# Altium PCB Board.PcbDoc
Units mm, origin at the board's own origin, x right, y up, seen from the top; angles counter-clockwise.
Board outline 55 x 30 mm, 2 copper layers (Top Layer, Bottom Layer), stack 1.57 mm thick; 42 components, 38 nets, 166 pads, 402 vias.
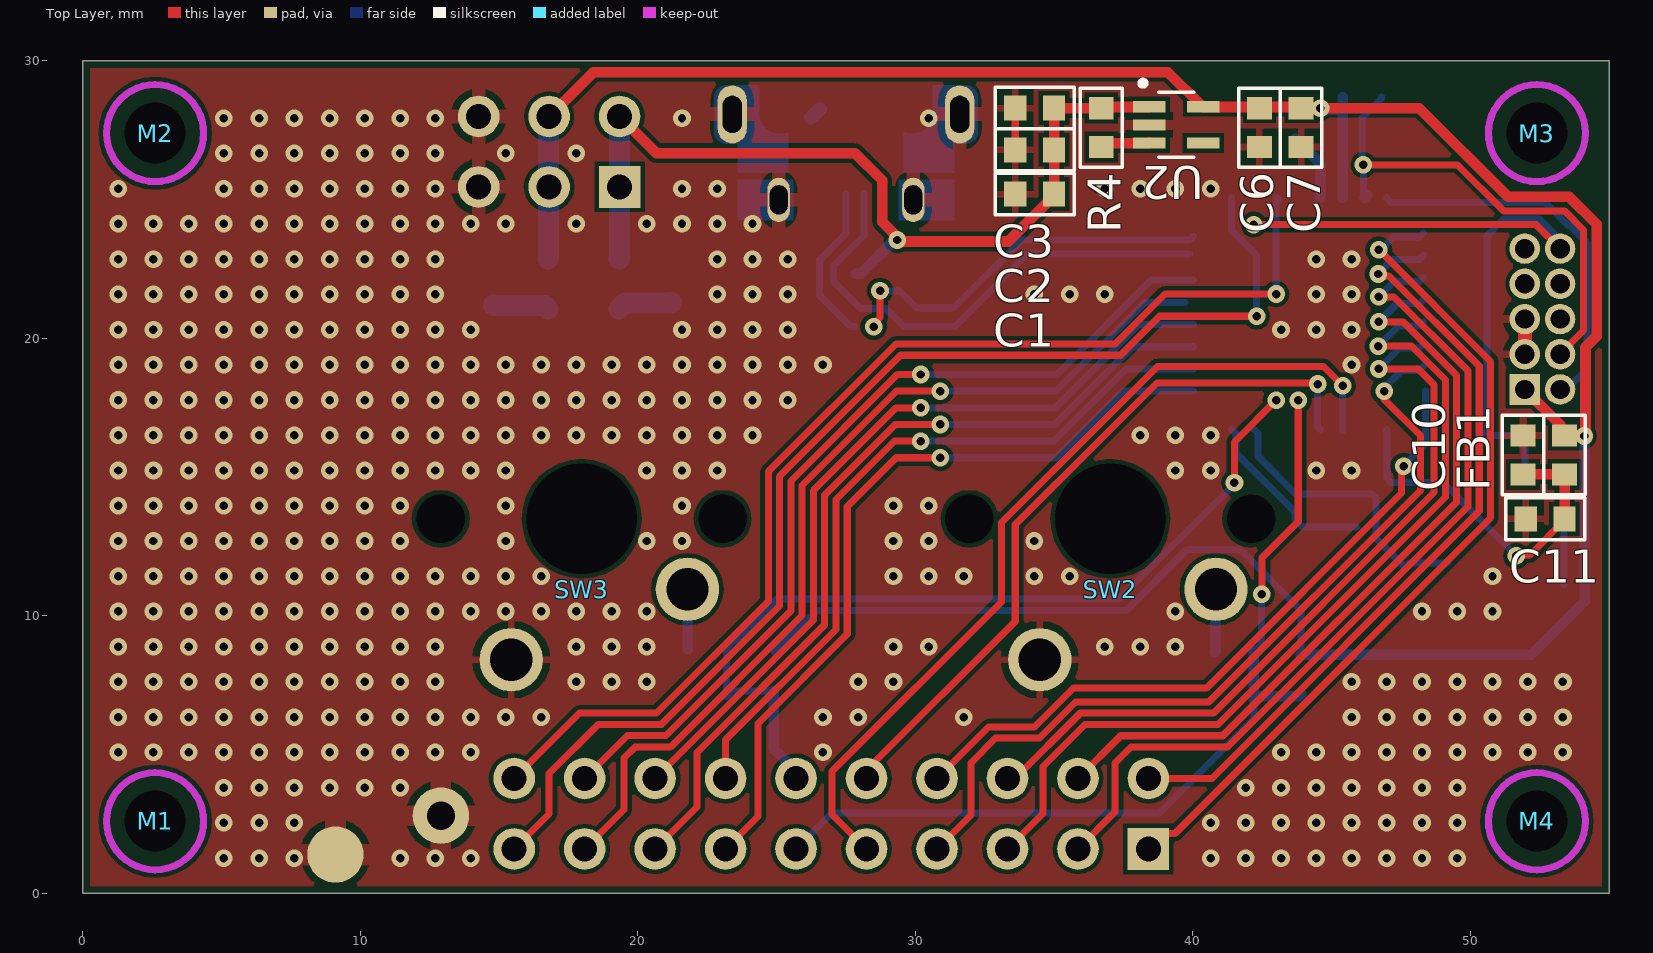
[diagram p0: Top Layer view]
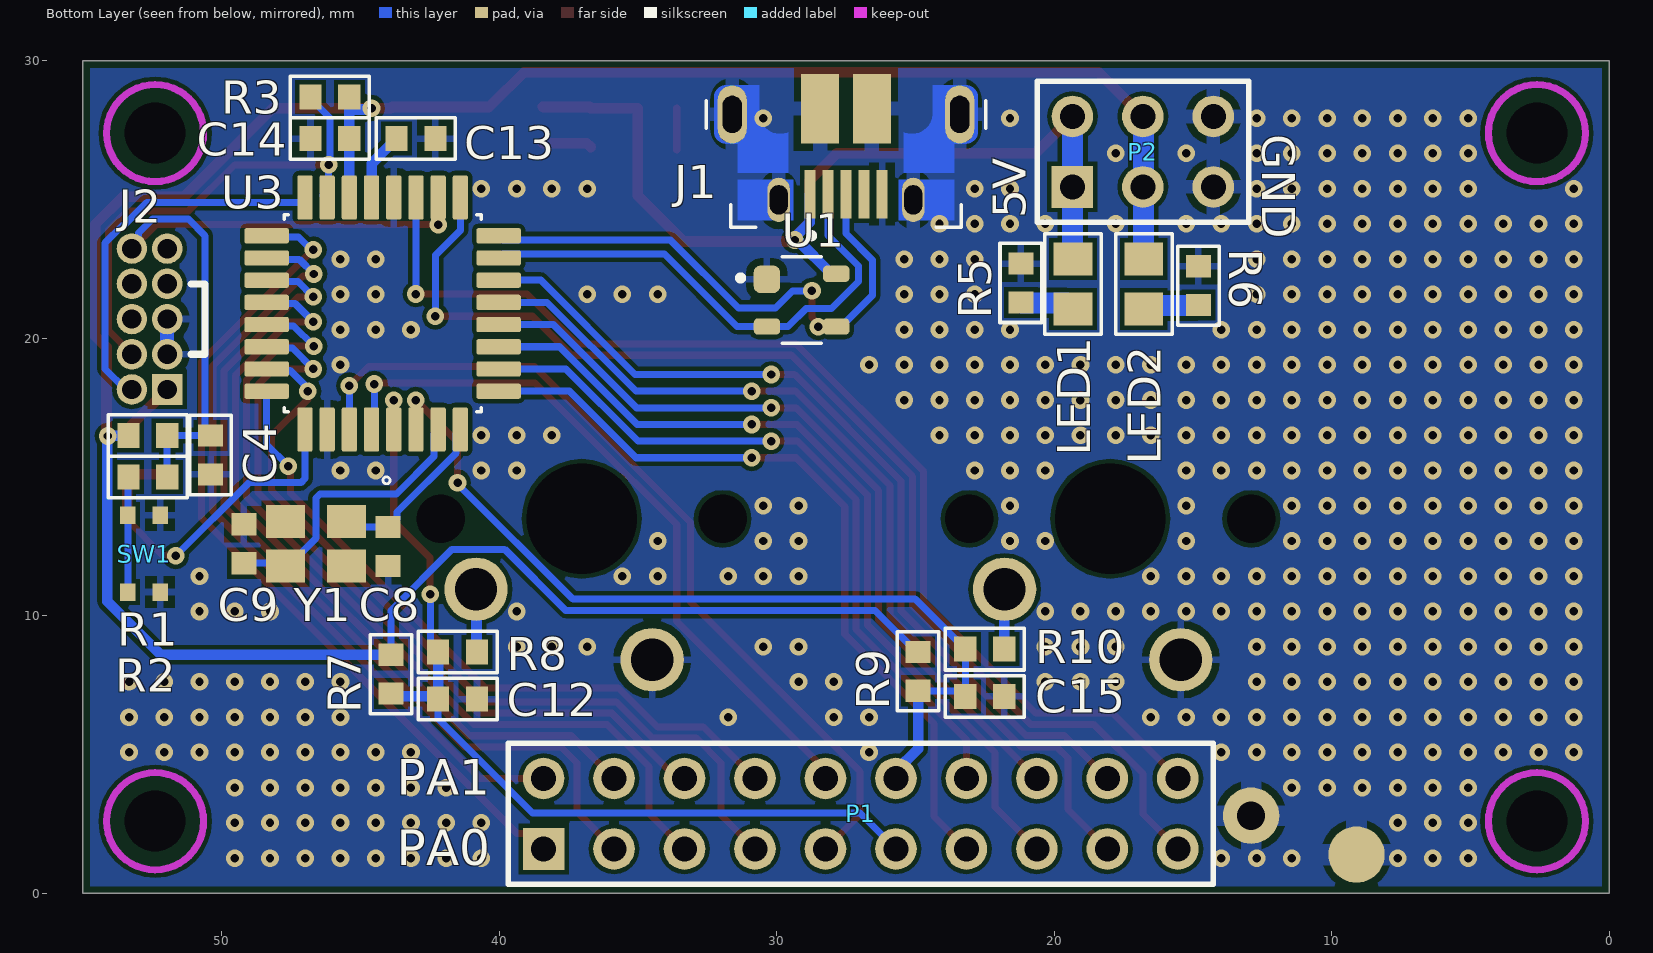
[diagram p1: Bottom Layer view, seen from below]
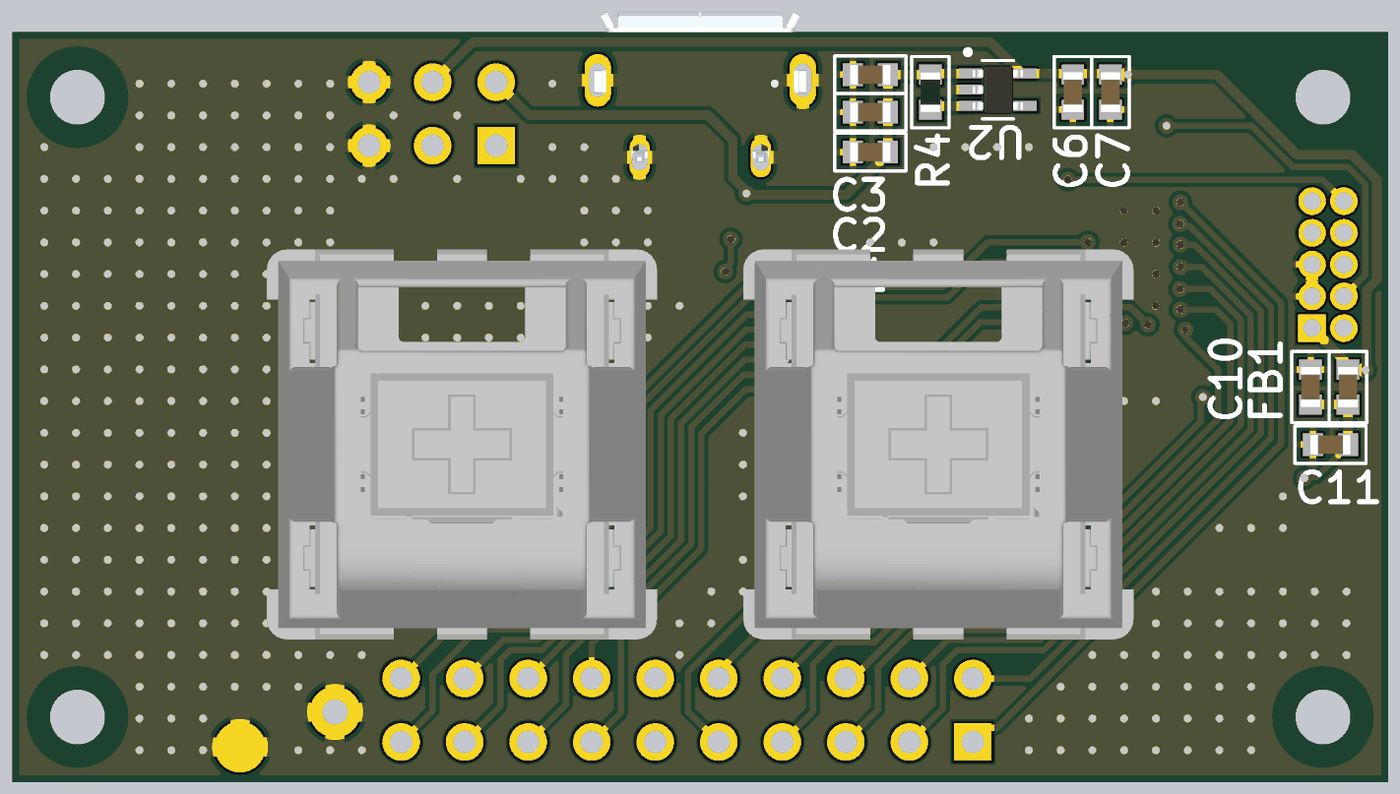
[diagram p2: 3D render of the assembled board from above, using the file's embedded part models]
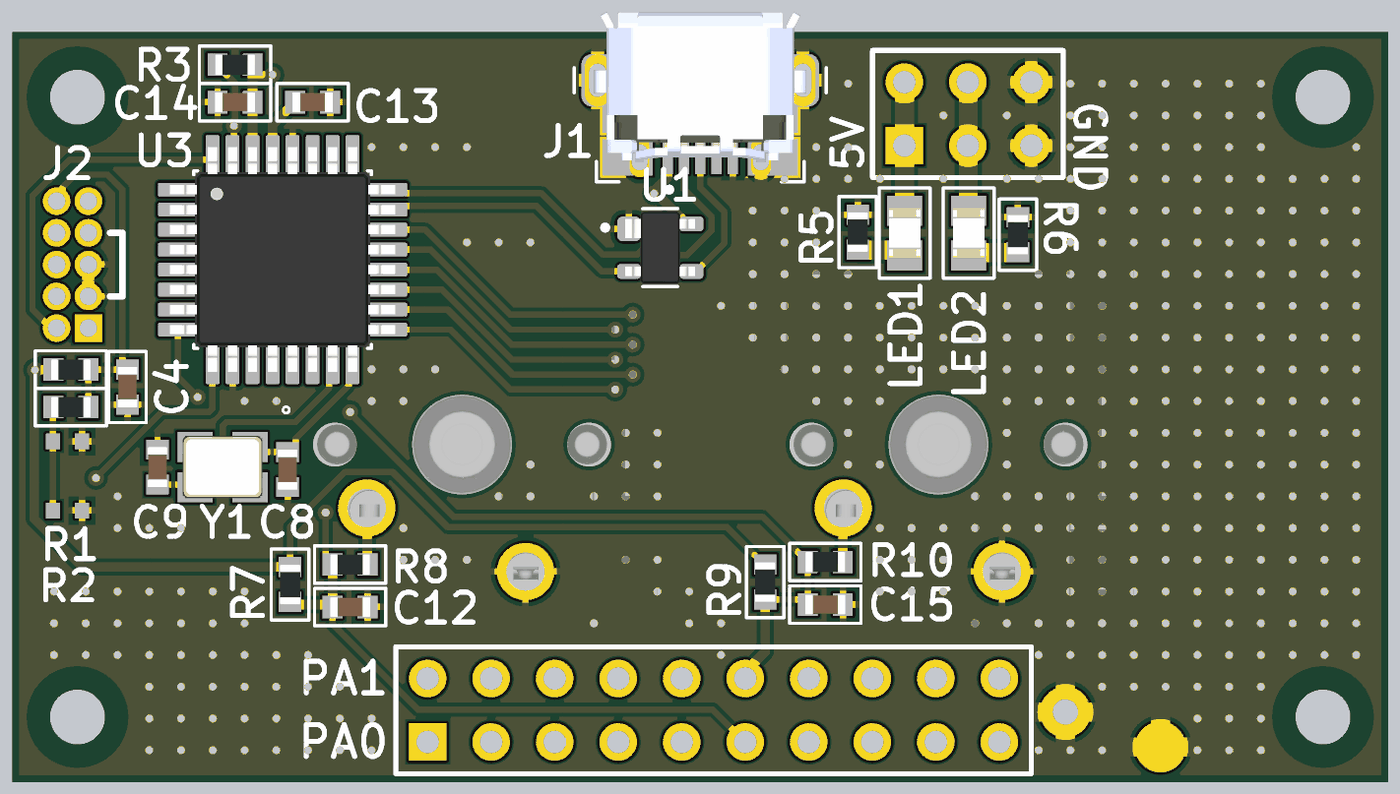
[diagram p3: 3D render of the assembled board from below, using the file's embedded part models]

## Layer stack, top to bottom
Top Solder: solder mask 0.0102, Solder Resist, Dk 3.5
Top Layer: signal copper 0.0356
Dielectric 1: core 1.4986, Core-043, Dk 4.3
Bottom Layer: signal copper 0.0356
Bottom Solder: solder mask 0.0102, Solder Resist, Dk 3.5

## Board outline
0,0 55,0 55,30 0,30

## Design rules (kind name [scope] priority, off if disabled: settings)
BoardOutlineClearance [All] p1: gap=0.254 ignorepadtopadclearanceinfootprint=FALSE except(0: Arc-SplitContinuation Track-SplitContinuation SMDPad-SplitContinuation THPad-SplitContinuation Via-SplitContinuation Fill-SplitContinuation Poly-SplitContinuation Region-SplitContinuation Text-SplitContinuation)
Clearance Clearance_Via_In_Pad [IsVia vs IsPad] p1: gap=0 ignorepadtopadclearanceinfootprint=FALSE
Clearance [All] p2: gap=0.152 ignorepadtopadclearanceinfootprint=FALSE except(0: Arc-Hole Track-Hole SMDPad-Hole THPad-Hole Via-Hole Fill-Hole Poly-Hole Region-Hole Text-Hole)
DiffPairsRouting [All] p1: maxlimit=0.254 minlimit=0.254 mostfreqgap=0.254 toplayer_minwidth=0.254 toplayer_maxwidth=0.381 toplayer_prefwidth=0.381 bottomlayer_minwidth=0.254 bottomlayer_maxwidth=0.381 bottomlayer_prefwidth=0.381 maxuncoupledlength=12.7
PolygonConnect [All] p1: thpad.connectstyle=Relief thpad.reliefconductorwidth=0.254 thpad.reliefentries=4 thpad.polygonreliefangle="90 Angle" thpad.airgapwidth=0.254 smdpad.connectstyle=Relief smdpad.reliefconductorwidth=0.254 smdpad.reliefentries=4 smdpad.polygonreliefangle="90 Angle" smdpad.airgapwidth=0.254 via.connectstyle=Direct via.reliefconductorwidth=0.254 via.reliefentries=4 via.polygonreliefangle="90 Angle" via.airgapwidth=0.254
RoutingVias [All] p1: holewidth=0.305 width=0.635 viastyle="Through Hole" minholewidth=0.254 minwidth=0.508 maxholewidth=0.711 maxwidth=1.27
SilkToSilkClearance [All] p1: silktosilkclearance=0.127
SolderMaskExpansion [All] p1: expansion=0.102 istentingtop=FALSE
Width [All] p1: maxlimit=2.54 minlimit=0.254 preferedwidth=0.254
28 further rules are at their usual default settings.

## Classes and differential pairs
differential pair USB_D: +USB_D_P -USB_D_N

## Components (designator, comment, footprint, x,y, rotation, side; value= is the part's Value field where it differs from the comment)
C1 "Cap" C0603 34.3,25.2 r180 top value=10uF
C2 "Cap" C0603 34.3,26.8 r180 top value=2.2uF
C3 "Cap" C0603 34.3,28.3 r180 top value=1uF
C4 "Cap" C0603 50.4,15.8 r270 bottom value=10nF
C6 "Cap" C0603 42.4,27.6 r270 top value=1uF
C7 "Cap" C0603 43.9,27.6 r270 top value=10uF
C8 "Cap" C0603 44,12.5 r270 bottom
C9 "Cap" C0603 49.2,12.6 r90 bottom
C10 "Cap" C0603 51.9,15.8 r90 top value=10uF
C11 "Cap" C0603 52.7,13.5 r180 top value=100nF
C12 "Cap" C0603 41.5,7 r180 bottom value=1nF
C13 "Cap" C0603 43,27.2 r180 bottom value=1uF
C14 "Cap" C0603 46.1,27.2 r0 bottom value=100nF
C15 "Cap" C0603 22.5,7.1 r180 bottom value=1nF
FB1 "Ferrite Bead" C0603 53.4,15.8 r270 top
J1 "10118194-0001LF" AMPHENOL_10103592-0001LF 27.5,28.075 r0 bottom locked
J2 "SWD_10_PIN" IPC_5X2_1.27MM 52.6,20.7 r90 bottom
LED1 "LED" LED0805 19.324,21.963 r270 bottom
LED2 "LED" LED0805 16.766,21.963 r270 bottom
M1 "SCREW_HOLE" SCREW_M2 2.6,2.6 r0 top locked
M2 "SCREW_HOLE" SCREW_M2 2.6,27.4 r0 top locked
M3 "SCREW_HOLE" SCREW_M2 52.4,27.4 r0 top
M4 "SCREW_HOLE" SCREW_M2 52.4,2.6 r0 top
P1 "Header 10X2" HDR2X10 38.4,1.6 r180 bottom
P2 "Header 3X2" HDR2X3 19.34,25.46 r180 bottom
R1 "Res" R0603 52.665,16.5 r180 bottom value=100K
R2 "Res" R0603 52.665,15 r0 bottom value=330
R3 "Res" R0603 46.1,28.7 r0 bottom value=1K
R4 "Res" R0603 36.7,27.6 r270 top value=10K
R5 "Res" R0603 21.2,22 r90 bottom value=330
R6 "Res" R0603 14.8,21.9 r90 bottom value=330
R7 "Res" R0603 43.9,7.9 r270 bottom value=10K
R8 "Res" R0603 41.5,8.7 r180 bottom value=330
R9 "Res" R0603 24.9,8 r270 bottom value=10K
R10 "Res" R0603 22.5,8.8 r180 bottom value=330
SW1 "Button" STU-057A23AX 52.8,12.246 r270 bottom
SW2 "CHERRY-MX" CHERRY_MX_1.0 37.025,13.5 r180 top
SW3 "CHERRY-MX" CHERRY_MX_1.0 17.975,13.5 r180 top
U1 "5.5V TVS Diode" SOT143 29.1,21.38 r180 bottom
U2 "MIC5365-3.3YC5-TR" SOT65P210X110-5N 39.4,27.7 r0 top
U3 "ATSAMD21EXXA/B/D" QFP80P900X900X120-32N 44.2,20.9 r180 bottom
Y1 "XTAL" SMD-4 46.6,12.6 r0 bottom

## Footprints (in the part's own frame and the unit in brackets; to place one, negate y for a bottom-side part, rotate by r counter-clockwise, add the part's x,y. Pads: shape width x height; smd on the part's side, far side on the other; paste and mask are expansions set on the pad)
AMPHENOL_10103592-0001LF [mm]
  rect 0.4x1.75 smd: 1(1.3,2.875) 2(0.65,2.875) 3(0,2.875) 4(-0.65,2.875) 5(-1.3,2.875)
  oval 0.8x1.6 hole 0.65 slot 1.05 at 90 deg: S1(-2.425,3.08) S2(2.425,3.08)
  oval 1.05x2.1 hole 0.7 slot 1.34 at 90 deg: S3(-4.1,0) S6(4.1,0)
  rect 1.375x2.5 smd: S4(-0.937,-0.2) S5(0.937,-0.2)
  Top Layer region: -2.66,3.804 -2.669,3.798 -2.677,3.791 -2.686,3.785 -2.694,3.778 -2.702,3.771 -2.71,3.764 -2.718,3.756 -2.725,3.748 -2.732,3.74 -2.739,3.732 -2.746,3.724 -2.752,3.715 -2.758,3.707 -2.764,3.698 -2.77,3.689 -2.776,3.68 -2.781,3.67 -2.786,3.661 -2.79,3.651 -2.795,3.641 -2.799,3.631 -2.802,3.621 -2.806,3.611 -2.809,3.601 -2.812,3.591 -2.814,3.58 -2.817,3.57 -2.819,3.559 -2.82,3.55 -2.81,2.59 -2.807,2.578 -2.804,2.568 -2.8,2.558 -2.796,2.548 -2.792,2.538 -2.788,2.528 -2.783,2.519 -2.778,2.509 -2.773,2.5 -2.767,2.49 -2.761,2.481 -2.755,2.472 -2.749,2.464 -2.743,2.455 -2.736,2.447 -2.729,2.439 -2.722,2.431 -2.714,2.423 -2.706,2.416 -2.698,2.408 -2.69,2.401 -2.682,2.395 -2.673,2.388 -2.665,2.382 -2.656,2.376 -2.647,2.37 -2.637,2.364 -2.628,2.359 -2.619,2.354 -2.61,2.35 -3.9,2.35 -3.9,3.81 -2.65,3.81
  Top Layer region: -1.9,2.35 -2.21,2.35 -2.202,2.355 -2.193,2.36 -2.184,2.367 -2.175,2.373 -2.167,2.38 -2.158,2.386 -2.15,2.394 -2.142,2.401 -2.134,2.408 -2.127,2.416 -2.119,2.424 -2.112,2.433 -2.105,2.441 -2.099,2.45 -2.092,2.458 -2.086,2.467 -2.08,2.477 -2.075,2.486 -2.069,2.495 -2.064,2.505 -2.06,2.515 -2.055,2.525 -2.051,2.535 -2.047,2.545 -2.044,2.555 -2.04,2.566 -2.037,2.576 -2.035,2.587 -2.032,2.597 -2.03,2.61 -2.04,3.58 -2.042,3.587 -2.044,3.596 -2.046,3.605 -2.049,3.613 -2.052,3.622 -2.056,3.63 -2.059,3.639 -2.063,3.647 -2.067,3.655 -2.071,3.663 -2.076,3.671 -2.08,3.679 -2.085,3.687 -2.09,3.694 -2.096,3.701 -2.101,3.709 -2.107,3.716 -2.113,3.722 -2.119,3.729 -2.126,3.736 -2.132,3.742 -2.139,3.748 -2.146,3.754 -2.153,3.76 -2.16,3.765 -2.168,3.77 -2.175,3.775 -2.183,3.78 -2.191,3.785 -2.2,3.79 -2.2,3.81 -1.9,3.81
  Top Layer region: 3.9,2.35 2.61,2.35 2.619,2.354 2.628,2.359 2.637,2.364 2.647,2.37 2.656,2.376 2.665,2.382 2.673,2.388 2.682,2.395 2.69,2.401 2.698,2.408 2.706,2.416 2.714,2.423 2.722,2.431 2.729,2.439 2.736,2.447 2.743,2.455 2.749,2.464 2.755,2.472 2.761,2.481 2.767,2.49 2.773,2.5 2.778,2.509 2.783,2.519 2.788,2.528 2.792,2.538 2.796,2.548 2.8,2.558 2.804,2.568 2.807,2.578 2.81,2.59 2.82,3.55 2.819,3.559 2.817,3.57 2.814,3.58 2.812,3.591 2.809,3.601 2.806,3.611 2.802,3.621 2.799,3.631 2.795,3.641 2.79,3.651 2.786,3.661 2.781,3.67 2.776,3.68 2.77,3.689 2.764,3.698 2.758,3.707 2.752,3.715 2.746,3.724 2.739,3.732 2.732,3.74 2.725,3.748 2.718,3.756 2.71,3.764 2.702,3.771 2.694,3.778 2.686,3.785 2.677,3.791 2.669,3.798 2.66,3.804 2.65,3.81 3.9,3.81
  Top Layer region: 2.2,3.79 2.191,3.785 2.183,3.78 2.175,3.775 2.168,3.77 2.16,3.765 2.153,3.76 2.146,3.754 2.139,3.748 2.132,3.742 2.126,3.736 2.119,3.729 2.113,3.722 2.107,3.716 2.101,3.709 2.096,3.701 2.09,3.694 2.085,3.687 2.08,3.679 2.076,3.671 2.071,3.663 2.067,3.655 2.063,3.647 2.059,3.639 2.056,3.63 2.052,3.622 2.049,3.613 2.046,3.605 2.044,3.596 2.042,3.587 2.04,3.58 2.03,2.61 2.032,2.597 2.035,2.587 2.037,2.576 2.04,2.566 2.044,2.555 2.047,2.545 2.051,2.535 2.055,2.525 2.06,2.515 2.064,2.505 2.069,2.495 2.075,2.486 2.08,2.477 2.086,2.467 2.092,2.458 2.099,2.45 2.105,2.441 2.112,2.433 2.119,2.424 2.127,2.416 2.134,2.408 2.142,2.401 2.15,2.394 2.158,2.386 2.167,2.38 2.175,2.373 2.184,2.367 2.193,2.36 2.202,2.355 2.21,2.35 1.9,2.35 1.9,3.81 2.2,3.81
  Top Layer region: 3.9,1.05 4.075,1.05 4.075,1.045 4.045,1.043 4.02,1.04 3.995,1.035 3.97,1.03 3.946,1.023 3.922,1.015 3.898,1.005 3.875,0.995 3.853,0.983 3.831,0.971 3.809,0.957 3.789,0.942 3.769,0.926 3.75,0.91 3.732,0.892 3.714,0.874 3.698,0.854 3.682,0.834 3.668,0.813 3.655,0.792 3.642,0.769 3.631,0.747 3.621,0.723 3.612,0.7 3.605,0.675 3.598,0.651 3.593,0.626 3.589,0.601 3.586,0.576 3.585,0.555 3.58,-0.53 3.581,-0.551 3.583,-0.577 3.586,-0.603 3.59,-0.628 3.596,-0.653 3.603,-0.678 3.611,-0.702 3.62,-0.726 3.631,-0.75 3.642,-0.773 3.655,-0.795 3.669,-0.817 3.684,-0.838 3.7,-0.858 3.717,-0.878 3.735,-0.896 3.754,-0.914 3.773,-0.931 3.794,-0.946 3.815,-0.961 3.837,-0.975 3.859,-0.987 3.882,-0.998 3.906,-1.009 3.93,-1.018 3.954,-1.026 3.979,-1.032 4.005,-1.038 4.03,-1.042 4.06,-1.045 4.06,-1.05 3.125,-1.05 3.125,0 3.12,0.053 3.112,0.1 3.101,0.147 3.087,0.193 3.07,0.238 3.051,0.281 3.028,0.324 3.003,0.365 2.975,0.404 2.945,0.442 2.913,0.477 2.878,0.51 2.841,0.541 2.803,0.57 2.763,0.596 2.721,0.619 2.677,0.64 2.633,0.658 2.587,0.673 2.541,0.685 2.493,0.694 2.446,0.7 2.398,0.703 2.35,0.703 2.302,0.699 2.254,0.693 2.207,0.684 2.161,0.671 2.115,0.656 2.075,0.64 2.075,2.1 3.9,2.1
  Top Layer region: 4.352,1.049 4.374,1.048 4.396,1.045 4.417,1.041 4.439,1.036 4.46,1.029 4.481,1.022 4.501,1.014 4.521,1.004 4.54,0.994 4.559,0.982 4.577,0.97 4.594,0.956 4.611,0.942 4.627,0.927 4.642,0.911 4.656,0.894 4.67,0.877 4.682,0.859 4.694,0.84 4.704,0.821 4.714,0.801 4.722,0.781 4.729,0.76 4.736,0.739 4.741,0.717 4.745,0.696 4.748,0.674 4.749,0.652 4.75,0.63 4.75,-0.63 4.749,-0.652 4.748,-0.674 4.745,-0.696 4.741,-0.717 4.736,-0.739 4.729,-0.76 4.722,-0.781 4.714,-0.801 4.704,-0.821 4.694,-0.84 4.682,-0.859 4.67,-0.877 4.656,-0.894 4.642,-0.911 4.627,-0.927 4.611,-0.942 4.594,-0.956 4.577,-0.97 4.559,-0.982 4.54,-0.994 4.521,-1.004 4.501,-1.014 4.481,-1.022 4.46,-1.029 4.439,-1.036 4.417,-1.041 4.396,-1.045 4.374,-1.048 4.352,-1.049 4.33,-1.05 4.105,-1.05 4.105,-1.045 4.13,-1.044 4.157,-1.042 4.183,-1.039 4.21,-1.034 4.236,-1.027 4.262,-1.02 4.288,-1.011 4.313,-1 4.337,-0.989 4.361,-0.976 4.384,-0.962 4.407,-0.946 4.428,-0.93 4.449,-0.912 4.468,-0.893 4.487,-0.874 4.505,-0.853 4.521,-0.832 4.537,-0.809 4.551,-0.786 4.564,-0.762 4.575,-0.738 4.586,-0.713 4.595,-0.687 4.602,-0.661 4.609,-0.635 4.614,-0.608 4.617,-0.582 4.619,-0.555 4.62,-0.525 4.62,0.555 4.619,0.576 4.616,0.601 4.612,0.626 4.607,0.651 4.6,0.675 4.593,0.7 4.584,0.723 4.574,0.747 4.563,0.769 4.55,0.792 4.537,0.813 4.523,0.834 4.507,0.854 4.491,0.874 4.473,0.892 4.455,0.91 4.436,0.926 4.416,0.942 4.396,0.957 4.374,0.971 4.352,0.983 4.33,0.995 4.307,1.005 4.283,1.015 4.259,1.023 4.235,1.03 4.21,1.035 4.185,1.04 4.16,1.043 4.13,1.045 4.13,1.05 4.33,1.05
  Top Layer region: -2.075,0.64 -2.115,0.656 -2.161,0.671 -2.207,0.684 -2.254,0.693 -2.302,0.699 -2.35,0.703 -2.398,0.703 -2.446,0.7 -2.493,0.694 -2.541,0.685 -2.587,0.673 -2.633,0.658 -2.677,0.64 -2.721,0.619 -2.763,0.596 -2.803,0.57 -2.841,0.541 -2.878,0.51 -2.913,0.477 -2.945,0.442 -2.975,0.404 -3.003,0.365 -3.028,0.324 -3.051,0.281 -3.07,0.238 -3.087,0.193 -3.101,0.147 -3.112,0.1 -3.12,0.053 -3.125,0 -3.125,-1.05 -4.06,-1.05 -4.06,-1.045 -4.03,-1.042 -4.005,-1.038 -3.979,-1.032 -3.954,-1.026 -3.93,-1.018 -3.906,-1.009 -3.882,-0.998 -3.859,-0.987 -3.837,-0.975 -3.815,-0.961 -3.794,-0.946 -3.773,-0.931 -3.754,-0.914 -3.735,-0.896 -3.717,-0.878 -3.7,-0.858 -3.684,-0.838 -3.669,-0.817 -3.655,-0.795 -3.642,-0.773 -3.631,-0.75 -3.62,-0.726 -3.611,-0.702 -3.603,-0.678 -3.596,-0.653 -3.59,-0.628 -3.586,-0.603 -3.583,-0.577 -3.581,-0.551 -3.58,-0.53 -3.585,0.555 -3.586,0.576 -3.589,0.601 -3.593,0.626 -3.598,0.651 -3.605,0.675 -3.612,0.7 -3.621,0.723 -3.631,0.747 -3.642,0.769 -3.655,0.792 -3.668,0.813 -3.682,0.834 -3.698,0.854 -3.714,0.874 -3.732,0.892 -3.75,0.91 -3.769,0.926 -3.789,0.942 -3.809,0.957 -3.831,0.971 -3.853,0.983 -3.875,0.995 -3.898,1.005 -3.922,1.015 -3.946,1.023 -3.97,1.03 -3.995,1.035 -4.02,1.04 -4.045,1.043 -4.075,1.045 -4.075,1.05 -3.9,1.05 -3.9,2.1 -2.075,2.1
  Top Layer region: -4.13,1.045 -4.16,1.043 -4.185,1.04 -4.21,1.035 -4.235,1.03 -4.259,1.023 -4.283,1.015 -4.307,1.005 -4.33,0.995 -4.352,0.983 -4.374,0.971 -4.396,0.957 -4.416,0.942 -4.436,0.926 -4.455,0.91 -4.473,0.892 -4.491,0.874 -4.507,0.854 -4.523,0.834 -4.537,0.813 -4.55,0.792 -4.563,0.769 -4.574,0.747 -4.584,0.723 -4.593,0.7 -4.6,0.675 -4.607,0.651 -4.612,0.626 -4.616,0.601 -4.619,0.576 -4.62,0.555 -4.62,-0.525 -4.619,-0.555 -4.617,-0.582 -4.614,-0.608 -4.609,-0.635 -4.602,-0.661 -4.595,-0.687 -4.586,-0.713 -4.575,-0.738 -4.564,-0.762 -4.551,-0.786 -4.537,-0.809 -4.521,-0.832 -4.505,-0.853 -4.487,-0.874 -4.468,-0.893 -4.449,-0.912 -4.428,-0.93 -4.407,-0.946 -4.384,-0.962 -4.361,-0.976 -4.337,-0.989 -4.313,-1 -4.288,-1.011 -4.262,-1.02 -4.236,-1.027 -4.21,-1.034 -4.183,-1.039 -4.157,-1.042 -4.13,-1.044 -4.105,-1.045 -4.105,-1.05 -4.33,-1.05 -4.352,-1.049 -4.374,-1.048 -4.396,-1.045 -4.417,-1.041 -4.439,-1.036 -4.46,-1.029 -4.481,-1.022 -4.501,-1.014 -4.521,-1.004 -4.54,-0.994 -4.559,-0.982 -4.577,-0.97 -4.594,-0.956 -4.611,-0.942 -4.627,-0.927 -4.642,-0.911 -4.656,-0.894 -4.67,-0.877 -4.682,-0.859 -4.694,-0.84 -4.704,-0.821 -4.714,-0.801 -4.722,-0.781 -4.729,-0.76 -4.736,-0.739 -4.741,-0.717 -4.745,-0.696 -4.748,-0.674 -4.749,-0.652 -4.75,-0.63 -4.75,0.63 -4.749,0.652 -4.748,0.674 -4.745,0.696 -4.741,0.717 -4.736,0.739 -4.729,0.76 -4.722,0.781 -4.714,0.801 -4.704,0.821 -4.694,0.84 -4.682,0.859 -4.67,0.877 -4.656,0.894 -4.642,0.911 -4.627,0.927 -4.611,0.942 -4.594,0.956 -4.577,0.97 -4.559,0.982 -4.54,0.994 -4.521,1.004 -4.501,1.014 -4.481,1.022 -4.46,1.029 -4.439,1.036 -4.417,1.041 -4.396,1.045 -4.374,1.048 -4.352,1.049 -4.33,1.05 -4.13,1.05
  silkscreen extent -5.04,-0.5 5.04,4.47, body extent -4.25,-2.73 4.25,3.28, height 2.73
C0603 [mm] "Chip Capacitor, Body 1.6x0.8mm, IPC High Density"
  rect 0.8x0.9 smd: 1(-0.7,0) 2(0.7,0)
  silkscreen extent -1.43,-0.75 1.43,0.75, body extent -0.8,-0.4 0.8,0.4, height 0.8
CHERRY_MX_1.0 [mil]
  round 90 hole 60: 1(-150,100) 2(100,200)
  round 0 hole 157 unplated: 31(0,0)
  oval 60x0 hole 69 unplated: 32(-200,0)
  round 0 hole 69 unplated: 32(200,0)
  body extent -307,-307 307,307, height 596
HDR2X3 [mm] "Connector; Header; 3x2 Position"
  rect 1.5x1.5 hole 0.9: 1(0,0)
  round 1.5 hole 0.9: 2(0,2.54) 3(2.54,0) 4(2.54,2.54) 5(5.08,0) 6(5.08,2.54)
  silkscreen extent -1.27,-1.27 6.35,3.81
HDR2X10 [mm] "Connector; Header; 10x2 Position"
  rect 1.5x1.5 hole 0.9: 1(0,0)
  round 1.5 hole 0.9: 2(0,2.54) 3(2.54,0) 4(2.54,2.54) 5(5.08,0) 6(5.08,2.54) 7(7.62,0) 8(7.62,2.54) 9(10.16,0) 10(10.16,2.54) 11(12.7,0) 12(12.7,2.54) 13(15.24,0) 14(15.24,2.54) 15(17.78,0) 16(17.78,2.54) 17(20.32,0) 18(20.32,2.54) 19(22.86,0) 20(22.86,2.54)
  silkscreen extent -1.27,-1.27 24.13,3.81
IPC_5X2_1.27MM [mm]
  rect 1.1x1.1 hole 0.7: 1(-2.54,-0.635)
  round 1.1 hole 0.7: 2(-2.54,0.635) 3(-1.27,-0.635) 4(-1.27,0.635) 5(0,-0.635) 6(0,0.635) 7(1.27,-0.635) 8(1.27,0.635) 9(2.54,-0.635) 10(2.54,0.635)
LED0805 [mm] "Chip Resistor, Body 2.0x1.2mm, IPC Medium Density"
  rect 1.2x1.4 smd: 1(-0.9,0) 2(0.9,0)
  silkscreen extent -1.8,-1.02 1.8,1.02, body extent -1,-0.62 1,0.63, height 1.1
QFP80P900X900X120-32N [mm]
  rrect25% 1.6x0.55 smd: 1(-4.18,2.8) 2(-4.18,2) 3(-4.18,1.2) 4(-4.18,0.4) 5(-4.18,-0.4) 6(-4.18,-1.2) 7(-4.18,-2) 8(-4.18,-2.8) 17(4.18,-2.8) 18(4.18,-2) 19(4.18,-1.2) 20(4.18,-0.4) 21(4.18,0.4) 22(4.18,1.2) 23(4.18,2) 24(4.18,2.8)
  rrect25% 0.55x1.6 smd: 9(-2.8,-4.18) 10(-2,-4.18) 11(-1.2,-4.18) 12(-0.4,-4.18) 13(0.4,-4.18) 14(1.2,-4.18) 15(2,-4.18) 16(2.8,-4.18) 25(2.8,4.18) 26(2,4.18) 27(1.2,4.18) 28(0.4,4.18) 29(-0.4,4.18) 30(-1.2,4.18) 31(-2,4.18) 32(-2.8,4.18)
  silkscreen extent -3.55,-3.55 3.55,3.55, body extent -4.5,-4.5 4.5,4.5, height 1.1
R0603 [mm] "Chip Resistor Body 1.6x0.8mm, IPC High Density"
  rect 0.8x0.9 smd: 1(-0.7,0) 2(0.7,0)
  silkscreen extent -1.43,-0.75 1.43,0.75, body extent -0.8,-0.4 0.8,0.4, height 0.45
SCREW_M2 [mm]
  round 0 hole 2.2 unplated: 1(0,0)
SMD-4 [mm]
  rect 1.4x1.2 smd: 1(-1.1,-0.8) 2(1.1,-0.8) 3(1.1,0.8) 4(-1.1,0.8)
  silkscreen extent -2.67,-2.41 -2.41,-2.16, body extent -1.6,-1.25 1.6,1.25, height 0.64
SOT65P210X110-5N [mm]
  rect 1.17x0.4 smd: 1(-0.97,0.65) 2(-0.97,0) 3(-0.97,-0.65) 4(0.97,-0.65) 5(0.97,0.65)
  silkscreen extent -1.3,-1.17 0.63,1.6, body extent -1,-1 1,1, height 1.05
SOT143 [mm]
  rrect50% 0.95x0.99 smd: 1(-1.25,0.75)
  rrect50% 0.95x0.59 smd: 2(-1.25,-0.95) 3(1.25,-0.95) 4(1.25,0.95)
  silkscreen extent -2.3,-1.56 0.7,1.56, body extent -1.4,-1.45 1.4,1.45, height 1.2
STU-057A23AX [mm]
  rect 0.63x0.56 smd: 1(-1.385,0.58) 1(1.385,0.58) 2(-1.385,-0.58) 2(1.385,-0.58)

## Part data
J1: "USB - micro B USB 2.0 Receptacle Connector 5 Position Surface Mount, Right Angle; Through Hole", Package=None, Availability=Unavailable, MF="Amphenol ICC", MP=10118194-0001LF, Price=None, SnapEDA_Link=https://www.snapeda.com/parts/10118194-0001LF/Amphenol%20FCI/view-part/1413308/?ref=snap
P1: "Header, 10-Pin, Dual row", LatestRevisionDate=17-Jul-2002, LatestRevisionNote="Re-released for DXP Platform.", Publisher="Altium Limited"
P2: "Header, 3-Pin, Dual row", LatestRevisionDate=17-Jul-2002, LatestRevisionNote="Re-released for DXP Platform.", Publisher="Altium Limited"
SW1: "Push Button"
U1: library part PRTR5V0U2X
U2: "Lin Reg 150mA SC-70-5", Package=None, Availability=Unavailable, MP=MIC5365-3.3YC5-TR, Price=None
Y1: "Crystal Oscillator", LatestRevisionDate=17-Jul-2002, LatestRevisionNote="Re-released for DXP Platform.", PackageDescription="Crystal, Thru-Hole; 2 Leads; Body 3.1 x 8.2 mm (Dia.xH)", PackageReference=R38, Published=8-Jun-2000, Publisher="Altium Limited"

## Free pads (board coordinates)
  round 2.032 all layers, no hole: 1(9.1,1.4)
  round 2.032 hole 1.016: 1(12.9,2.8)

## Via types
v1: diameter 0.635, hole 0.305, Top Layer to Bottom Layer, tented both sides, 402 vias

## Nets (pads, with @x,y where several pads share a name; then routed paths per layer and width w, separated by ;. In a path a pad name is that pad's centre, name@x,y a point inside that pad or via, vN(x,y) a via of type N, cw(c..) or ccw(c..) an arc to the next point about the centre after c; other vN are vias at no path point)
+3V3: C6.1 C7.1 C14.1 FB1.1 J2.1 LED2.1 P2.3 P2.4 R1.1 R3.1 R7.1 R9.1 U2.5 U3.30 | length 101.8
  Top Layer w0.381: P2.4 18.4,29.6 39.1,29.6 U2.5@40.264,28.436 ; U2.5 40.38,28.34 42.4,28.34 43.86,28.34 C7.1 v1(44.6,28.3) 48.165,28.3 51.365,25.1 53.565,25.1 54.556,24.109 54.556,20.086 54.153,19.683 54.153,16.715 54.151,16.713 54.151,16.533 v1(54.102,16.485) ; J2.1 53.241,16.884 53.241,16.709 FB1.1@53.45,16.5 ; FB1.1 v1@54.1,16.5
  Bottom Layer w0.254: R9.1 24.95,8.7 26.45,10.2 37.6,10.2 39.8,12.4 41.7,12.4 43.9,10.2 R7.1
  Bottom Layer w0.381: R7.1 52.199,8.6 54.127,10.528 54.127,16.459 v1(54.102,16.485) ; v1(44.6,28.3) 44.649,28.251 R3.1@45.4,28.251 ; U3.30 C14.1 R3.1@45.4,28.251 ; R3.1 R3.1@45.4,28.251 ; R1.1 v1@54.2,16.5
  Bottom Layer w0.762: LED2.1 16.783,22.88 16.783,27.983 P2.4
GND: C1.2 C2.2 C3.2 C4.2 C6.2 C7.2 C8.2 C9.2 C10.2 C11.2 C12.2 C13.2 C14.2 C15.2 J1.5 J1.S1 J1.S2 J1.S3 J1.S4 J1.S5 J1.S6 J2.3 J2.5 P2.5 P2.6 pad.1 R5.2 R6.2 SW1.1 SW2.2 SW3.2 U1.1 U2.2 U3.10 U3.28 | length 4.6
  Top Layer w0.254: C2.2 C3.2
  Top Layer w0.508: J2.3 J2.5
  Bottom Layer w0.508: 24.4,26.7 24.5,26.6 ; J1.S4@26.244,27.956 J1.S4 ; J2.3 J2.5
  other v1: 5.08,1.27 6.35,1.27 7.62,1.27 11.43,1.27 12.7,1.27 13.97,1.27 40.64,1.27 41.91,1.27 43.18,1.27 44.45,1.27 45.72,1.27 46.99,1.27 48.26,1.27 49.53,1.27 5.08,2.54 6.35,2.54 7.62,2.54 40.64,2.54 41.91,2.54 43.18,2.54 44.45,2.54 45.72,2.54 46.99,2.54 48.26,2.54 49.53,2.54 5.08,3.81 6.35,3.81 7.62,3.81 8.89,3.81 10.16,3.81 11.43,3.81 41.91,3.81 43.18,3.81 44.45,3.81 45.72,3.81 46.99,3.81 48.26,3.81 49.53,3.81 1.27,5.08 2.54,5.08 3.81,5.08 5.08,5.08 6.35,5.08 7.62,5.08 8.89,5.08 10.16,5.08 11.43,5.08 12.7,5.08 13.97,5.08 26.67,5.08 43.18,5.08 44.45,5.08 45.72,5.08 46.99,5.08 48.26,5.08 49.53,5.08 50.8,5.08 52.07,5.08 53.34,5.08 1.27,6.35 2.54,6.35 3.81,6.35 5.08,6.35 6.35,6.35 7.62,6.35 8.89,6.35 10.16,6.35 11.43,6.35 12.7,6.35 13.97,6.35 15.24,6.35 16.51,6.35 26.67,6.35 27.94,6.35 31.75,6.35 45.72,6.35 46.99,6.35 48.26,6.35 49.53,6.35 50.8,6.35 52.07,6.35 53.34,6.35 1.27,7.62 2.54,7.62 3.81,7.62 5.08,7.62 6.35,7.62 7.62,7.62 8.89,7.62 10.16,7.62 11.43,7.62 12.7,7.62 17.78,7.62 19.05,7.62 20.32,7.62 27.94,7.62 29.21,7.62 45.72,7.62 46.99,7.62 48.26,7.62 49.53,7.62 50.8,7.62 52.07,7.62 53.34,7.62 1.27,8.89 2.54,8.89 3.81,8.89 5.08,8.89 6.35,8.89 7.62,8.89 8.89,8.89 10.16,8.89 11.43,8.89 12.7,8.89 17.78,8.89 19.05,8.89 20.32,8.89 29.21,8.89 30.48,8.89 36.83,8.89 38.1,8.89 39.37,8.89 1.27,10.16 2.54,10.16 3.81,10.16 5.08,10.16 6.35,10.16 7.62,10.16 8.89,10.16 10.16,10.16 11.43,10.16 12.7,10.16 13.97,10.16 15.24,10.16 16.51,10.16 17.78,10.16 19.05,10.16 20.32,10.16 39.37,10.16 48.26,10.16 49.53,10.16 50.8,10.16 1.27,11.43 2.54,11.43 3.81,11.43 5.08,11.43 6.35,11.43 7.62,11.43 8.89,11.43 10.16,11.43 11.43,11.43 12.7,11.43 13.97,11.43 15.24,11.43 16.51,11.43 29.21,11.43 30.48,11.43 31.75,11.43 34.29,11.43 35.56,11.43 50.8,11.43 1.27,12.7 2.54,12.7 3.81,12.7 5.08,12.7 6.35,12.7 7.62,12.7 8.89,12.7 10.16,12.7 11.43,12.7 15.24,12.7 20.32,12.7 21.59,12.7 29.21,12.7 30.48,12.7 34.29,12.7 1.27,13.97 2.54,13.97 3.81,13.97 5.08,13.97 6.35,13.97 7.62,13.97 8.89,13.97 10.16,13.97 11.43,13.97 15.24,13.97 21.59,13.97 29.21,13.97 30.48,13.97 1.27,15.24 2.54,15.24 3.81,15.24 5.08,15.24 6.35,15.24 7.62,15.24 8.89,15.24 10.16,15.24 11.43,15.24 12.7,15.24 13.97,15.24 15.24,15.24 20.32,15.24 21.59,15.24 22.86,15.24 39.37,15.24 40.64,15.24 44.45,15.24 45.72,15.24 1.27,16.51 2.54,16.51 3.81,16.51 5.08,16.51 6.35,16.51 7.62,16.51 8.89,16.51 10.16,16.51 11.43,16.51 12.7,16.51 13.97,16.51 15.24,16.51 16.51,16.51 17.78,16.51 19.05,16.51 20.32,16.51 21.59,16.51 22.86,16.51 24.13,16.51 38.1,16.51 39.37,16.51 40.64,16.51 1.27,17.78 2.54,17.78 3.81,17.78 5.08,17.78 6.35,17.78 7.62,17.78 8.89,17.78 10.16,17.78 11.43,17.78 12.7,17.78 13.97,17.78 15.24,17.78 16.51,17.78 17.78,17.78 19.05,17.78 20.32,17.78 21.59,17.78 22.86,17.78 24.13,17.78 25.4,17.78 1.27,19.05 2.54,19.05 3.81,19.05 5.08,19.05 6.35,19.05 7.62,19.05 8.89,19.05 10.16,19.05 11.43,19.05 12.7,19.05 13.97,19.05 15.24,19.05 16.51,19.05 17.78,19.05 19.05,19.05 20.32,19.05 21.59,19.05 22.86,19.05 24.13,19.05 25.4,19.05 26.67,19.05 45.72,19.05 1.27,20.32 2.54,20.32 3.81,20.32 5.08,20.32 6.35,20.32 7.62,20.32 8.89,20.32 10.16,20.32 11.43,20.32 12.7,20.32 13.97,20.32 21.59,20.32 22.86,20.32 24.13,20.32 25.4,20.32 43.18,20.32 44.45,20.32 45.72,20.32 1.27,21.59 2.54,21.59 3.81,21.59 5.08,21.59 6.35,21.59 7.62,21.59 8.89,21.59 10.16,21.59 11.43,21.59 12.7,21.59 22.86,21.59 24.13,21.59 25.4,21.59 34.29,21.59 35.56,21.59 36.83,21.59 44.45,21.59 45.72,21.59 1.27,22.86 2.54,22.86 3.81,22.86 5.08,22.86 6.35,22.86 7.62,22.86 8.89,22.86 10.16,22.86 11.43,22.86 12.7,22.86 22.86,22.86 24.13,22.86 25.4,22.86 44.45,22.86 45.72,22.86 1.27,24.13 2.54,24.13 3.81,24.13 5.08,24.13 6.35,24.13 7.62,24.13 8.89,24.13 10.16,24.13 11.43,24.13 12.7,24.13 13.97,24.13 15.24,24.13 17.78,24.13 20.32,24.13 21.59,24.13 22.86,24.13 24.13,24.13 1.27,25.4 5.08,25.4 6.35,25.4 7.62,25.4 8.89,25.4 10.16,25.4 11.43,25.4 12.7,25.4 21.59,25.4 22.86,25.4 36.83,25.4 38.1,25.4 39.37,25.4 40.64,25.4 5.08,26.67 6.35,26.67 7.62,26.67 8.89,26.67 10.16,26.67 11.43,26.67 12.7,26.67 15.24,26.67 17.78,26.67 5.08,27.94 6.35,27.94 7.62,27.94 8.89,27.94 10.16,27.94 11.43,27.94 12.7,27.94 21.59,27.94 30.48,27.94
NetC8_1: C8.1 U3.16 Y1.1 | length 6.5
  Bottom Layer w0.254: U3.16 41.548,16.572 41.548,15.877 43.677,13.748 43.677,13.473 43.95,13.2 C8.1 Y1.1@45.9,13.2
NetC9_1: C9.1 U3.15 Y1.3 | length 10.4
  Bottom Layer w0.254: U3.15 42.348,16.572 42.348,15.752 43.7,14.4 46.451,14.4 46.6,14.251 46.6,12.8 47.6,11.8 Y1.3 47.8,11.9 C9.1
NetC10_1: C10.1 C11.1 FB1.2 U3.9 | length 12.5
  Top Layer w0.254: v1(51.661,12.161) 51.698,12.198 52.148,12.198 53.4,13.45 C11.1
  Top Layer w0.381: C10.1@51.983,15.123 51.994,15.112 53.388,15.112 FB1.2 C11.1@53.4,13.9
  Bottom Layer w0.254: U3.9 47,14.949 47.149,14.8 49.022,14.8 v1(51.661,12.161)
NetC13_1: C13.1 U3.29 | length 2.5
  Bottom Layer w0.381: C13.1 43.7,27.15 43.91,26.94 43.96,26.94 44.6,26.3 U3.29
NetLED1_2: LED1.2 R5.1 | length 2
  Bottom Layer w0.762: LED1.2 19.542,21.281 21.181,21.281 R5.1
NetLED2_2: LED2.2 R6.1 | length 2
  Bottom Layer w0.762: R6.1 14.819,21.181 16.648,21.181 LED2.2
NetR2_2: R2.2 SW1.2 | length 3.9
  Bottom Layer w0.254: R2.2 53.38,14.985 53.38,13.885 SW1.2@53.38,11.115
NetR4_2: R4.2 U2.3 | length 1.8
  Top Layer w0.381: R4.2 36.841,27.04 38.42,27.04 U2.3
NetR8_2: R8.2 SW2.1 | length 2.3
  Bottom Layer w0.381: R8.2 40.818,8.718 40.818,10.943 SW2.1
NetR10_2: R10.2 SW3.1 | length 2.2
  Bottom Layer w0.381: SW3.1 21.793,10.953 21.793,8.807 R10.2
nRESET: C4.1 J2.10 R1.2 R2.1 U3.26 | length 25.2
  Top Layer w0.254: v1(42.2,24.1) 52.375,24.1 J2.10
  Bottom Layer w0.254: C4.1 C4.1@50.45,16.5 ; R2.1 R1.2 C4.1@50.45,16.5 ; J2.10 53.235,23.469 52.993,23.711 52.993,23.807 52.5,24.3 51.2,24.3 50.6,23.7 50.6,16.65 C4.1@50.45,16.5
PA0: P1.1 U3.1 | length 30.5
  Top Layer w0.254: P1.1 38.965,2.165 39.365,2.165 40.934,3.734 50.729,13.529 50.729,19.171 v1(46.7,23.2)
  Bottom Layer w0.254: v1(46.7,23.2) 46.784,23.2 47.236,23.652 48.172,23.652 U3.1@48.32,23.8
PA1: P1.2 U3.2 | length 28
  Top Layer w0.254: P1.2 40.688,4.14 50.323,13.774 50.323,19.002 47.075,22.251 v1@46.752,22.251
  Bottom Layer w0.254: v1(46.679,22.323) 47.208,22.852 48.172,22.852 U3.2@48.32,23
PA2: P1.3 U3.3 | length 31.3
  Top Layer w0.254: P1.3 37.2,2.94 37.2,4.7 37.774,5.274 41.248,5.274 49.916,13.943 49.916,18.834 47.251,21.5 v1(46.7,21.5)
  Bottom Layer w0.254: v1(46.7,21.5) 47.252,22.052 48.172,22.052 U3.3@48.32,22.2
PA3: P1.4 U3.4 | length 27.9
  Top Layer w0.254: P1.4 37.401,5.681 41.08,5.681 49.51,14.111 49.51,18.666 47.576,20.6 v1(46.7,20.6)
  Bottom Layer w0.254: v1(46.7,20.6) 47.352,21.252 48.172,21.252 U3.4@48.32,21.4
PA4: P1.5 U3.5 | length 31.2
  Top Layer w0.254: P1.5 34.6,2.88 34.6,4.576 36.111,6.087 40.911,6.087 49.104,14.279 49.104,18.497 47.879,19.722 v1(46.678,19.722)
  Bottom Layer w0.254: v1(46.678,19.722) 47.408,20.452 48.172,20.452 U3.5@48.32,20.6
PA5: P1.6 U3.6 | length 27.8
  Top Layer w0.254: P1.6 33.589,4.14 35.943,6.494 40.743,6.494 48.697,14.448 48.697,18.329 48.126,18.9 v1(46.7,18.9)
  Bottom Layer w0.254: v1(46.7,18.9) 47.452,19.652 48.172,19.652 U3.6@48.32,19.8
PA6: P1.7 U3.7 | length 29.8
  Top Layer w0.254: P1.7 32,2.82 32,4.7 32.894,5.594 34.468,5.594 35.775,6.9 40.575,6.9 48.2,14.525 48.2,16.5 46.9,17.8 v1(46.9,18.1)
  Bottom Layer w0.254: v1(46.9,18.1) 46.9,18.21 47.542,18.852 48.172,18.852 U3.7@48.32,19
PA7: P1.8 U3.8 | length 25
  Top Layer w0.254: P1.8 32.64,6 34.3,6 35.7,7.4 40.5,7.4 47.524,14.424 47.524,15.327 v1(47.597,15.4)
  Bottom Layer w0.254: v1(47.597,15.4) 48.38,16.183 U3.8
PA8: P1.9 U3.11 | length 31.3
  Top Layer w0.254: P1.9 27,2.84 27,4.4 33.101,10.501 33.101,13.365 38.723,18.987 44.713,18.987 v1(45.4,18.3)
  Bottom Layer w0.254: U3.11@45.4,16.68 U3.11 v1(45.4,18.3)
PA9: P1.10 U3.12 | length 26.1
  Top Layer w0.254: P1.10 28.24,4.44 33.6,9.8 33.6,13.29 36.705,16.395 38.705,18.395 44.461,18.395 v1(44.499,18.357)
  Bottom Layer w0.254: v1(44.499,18.357) 44.499,16.821 U3.12
PA10: C12.1 P1.11 R7.2 R8.1 U3.13 | length 32.4
  Top Layer w0.254: v1(42.478,10.778) 42.5,10.8 42.5,12.1 43.8,13.4 v1(43.8,17.771)
  Bottom Layer w0.254: P1.11 27,2.9 38.8,2.9 42.2,6.3 C12.1 ; R8.1 42.473,8.973 42.473,10.773 v1(42.478,10.778)
  Bottom Layer w0.381: R8.1 C12.1 42.3,7.1 43.8,7.1 R7.2
PA11: C15.1 P1.12 R9.2 R10.1 U3.14 | length 31.4
  Top Layer w0.254: v1(41.5,14.8) 41.5,16.271 v1(43,17.771)
  Bottom Layer w0.254: R9.2 23.4,7.3 C15.1 R10.1 23.2,8.85 23.473,9.123 23.523,9.123 25.006,10.606 37.346,10.606 41.5,14.76 v1(41.5,14.8)
  Bottom Layer w0.381: R9.2 24.9,5.209 25.7,4.409 P1.12
PA16: P1.13 U3.17 | length 28.4
  Top Layer w0.254: P1.13 24.325,2.765 24.325,6.125 27.545,9.345 27.545,13.945 29.3,15.7 v1(30.9,15.7)
  Bottom Layer w0.254: v1(30.9,15.7) 35.073,15.7 37.473,18.1 U3.17
PA17: P1.14 U3.18 | length 26.5
  Top Layer w0.254: P1.14 23.16,5.535 27.138,9.513 27.138,14.19 29.248,16.3 v1(30.2,16.3)
  Bottom Layer w0.254: v1(30.2,16.3) 34.999,16.3 37.599,18.9 U3.18
PA18: P1.15 U3.19 | length 30.8
  Top Layer w0.254: P1.15 22.131,3.111 22.131,5.08 26.732,9.681 26.732,14.358 29.274,16.9 v1(30.9,16.9)
  Bottom Layer w0.254: v1(30.9,16.9) 35.024,16.9 37.824,19.7 U3.19
PA19: P1.16 U3.20 | length 28.9
  Top Layer w0.254: P1.16 20.62,4.144 26.326,9.85 26.326,14.527 29.299,17.5 v1(30.2,17.5)
  Bottom Layer w0.254: v1(30.2,17.5) 35.049,17.5 38.049,20.5 U3.20
PA22: P1.17 U3.21 | length 33.6
  Top Layer w0.254: P1.17 19.5,3.02 19.5,4.876 19.905,5.281 21.182,5.281 25.919,10.018 25.919,14.695 29.324,18.1 v1(30.9,18.1)
  Bottom Layer w0.254: v1(30.9,18.1) 35.075,18.1 38.275,21.3 U3.21@39.724,21.3
PA23: P1.18 U3.22 | length 32.1
  Top Layer w0.254: P1.18 19.627,5.687 21.014,5.687 25.513,10.186 25.513,14.863 29.349,18.7 v1(30.2,18.7)
  Bottom Layer w0.254: v1(30.2,18.7) 35.1,18.7 38.5,22.1 U3.22
PA27: P1.19 U3.25 | length 43
  Top Layer w0.254: P1.19 16.8,2.86 16.8,4.316 18.578,6.094 20.845,6.094 25.106,10.355 25.106,15.032 29.468,19.394 37.394,19.394 38.8,20.8 v1(42.3,20.8)
  Bottom Layer w0.254: U3.25 41.4,23.9 42.3,23 v1(42.3,20.8)
PA28: P1.20 U3.27 | length 41
  Top Layer w0.254: P1.20 17.9,6.5 20.677,6.5 24.7,10.523 24.7,15.2 29.3,19.8 37.2,19.8 39,21.6 v1(43,21.6)
  Bottom Layer w0.254: v1(43,21.6) 43,24.88 43.1,24.98 U3.27
SWDCLK: J2.4 R3.2 U3.31 | length 17.8
  Top Layer w0.254: v1(46.145,26.255) 49.545,26.255 51.2,24.6 53.4,24.6 54.086,23.914 54.086,20.281 J2.4
  Bottom Layer w0.254: U3.31 46.145,25.135 v1(46.145,26.255) 46.1,26.3 46.1,27.95 46.8,28.65 R3.2
  Bottom Layer w0.381: U3.31 U3.31@46.285,25.164
SWDIO: J2.2 U3.32 | length 13.7
  Bottom Layer w0.254: U3.32 47,25.048 47.148,24.9 52.7,24.9 53.531,24.069 53.579,24.069 54.2,23.448 54.2,18.9 53.46,18.16 J2.2
USB_D_N: J1.2 U1.2 U3.23 | length 18.2
  Bottom Layer w0.254: J1.2 28.15,23.709 27.051,22.61 27.051,22.05 28.019,21.082 28.934,21.082 29.586,20.43 31.427,20.43 34.043,23.046 U3.23@39.874,23.046
USB_D_P: J1.3 U1.3 U3.24 | length 19.8
  Top Layer w0.254: v1(28.499,20.422) 28.499,20.525 28.727,20.753 v1(28.727,21.717)
  Bottom Layer w0.254: J1.3 27.5,23.777 26.543,22.82 26.543,21.557 27.67,20.43 U1.3 ; v1(28.727,21.717) 28.733,21.712 29.426,21.712 30.044,21.093 31.372,21.093 33.833,23.554 39.874,23.554 U3.24
VBUS: C1.1 C2.1 C3.1 J1.1 LED1.1 P2.1 P2.2 R4.1 U1.4 U2.1 | length 35
  Top Layer w0.254: C1.1@35,25.15 C1.1
  Top Layer w0.381: P2.2 20.658,26.682 27.818,26.682 28.8,25.7 28.8,24.2 29.4,23.6 v1@29.295,23.495 ; v1(29.347,23.548) v1@29.295,23.495 ; C1.1@35,25.15 33.345,23.495 v1@29.295,23.495 ; C1.1 C2.1 C3.1 R4.1 36.741,28.34 38.42,28.34 U2.1
  Bottom Layer w0.381: U1.4 28.03,22.33 29.248,23.548 v1(29.347,23.548) 29.347,23.653 28.81,24.191 28.81,25.191 J1.1
  Bottom Layer w0.762: LED1.1 19.332,22.871 19.332,27.992 P2.2
pads on no net: J1.4 J2.6 J2.7 J2.8 J2.9 M1.1 M2.1 M3.1 M4.1 SW2.31 SW2.32 SW3.31 SW3.32 U2.4 Y1.2 Y1.4

## Polygon pours and split planes (outlines as drawn)
GND on Top Layer "GND_L01_P001" (solid, remove dead copper, pour order 1): 0,0 55,0 55,30 0,30
GND on Bottom Layer "GND_L02_P000" (solid, remove dead copper, pour order 0): 0,0 55,0 55,30 0,30

## Keep-outs
Keep-Out Layer:
  circle w0.254: c2.6,27.4 r1.75
  circle w0.254: c2.6,2.6 r1.75
  circle w0.254: c52.4,2.6 r1.75
  circle w0.254: c52.4,27.4 r1.75

## Silkscreen, mask and mechanical layers (free items; w line width, h text height)
Bottom Overlay:
  lines w0.254: 51.1,19.43 50.6,19.43 50.6,21.97 51.1,21.97
  text "GND" at 12.5,27.359 h1.2 r90
  text "5V" at 21.028,24.33 h1.2 r270

## Text inside footprints (layer, text, board x,y; h text height)
P1: Bottom Overlay "PA0" at 43.688,1.016 h1.27; Bottom Overlay "PA1" at 43.688,3.556 h1.27